# EAGLE board CT_schematic (EAGLE 7.6.0)

Size 100 x 80 mm. Coordinates in mm from the lower left corner, seen from the top.
Outline: 0,0 100,0 100,80 0,80 0,0
Copper layers (1*16): Top 0.035mm / dielectric 1.5mm / Bottom 0.035mm
Design rules "default": minimum track width 10mil, minimum drill 24mil, track to track 8mil, track to pad 8mil, pad to pad 8mil, via to via 8mil, smd to smd 8mil, copper to edge 40mil, drill to drill 8mil, minimum pad ring 10mil, minimum via ring 8mil, stop-mask expansion 4mil, vias tented up to drill 0mil, thermal gap 10mil

## Footprints (pad centres in the part's own frame; a part is rotated, then mirrored left to right if it is on the bottom)
C0603 = smd 0.8 x 0.8: 1 -0.762,0; 2 0.762,0
C0402 = smd 0.5 x 0.5: 1 -0.508,0; 2 0.508,0
C1210 = smd 1.2 x 2.5: 1 -1.524,0; 2 1.524,0
EXV-9H = smd 3.505 x 1.676: 1 -2.857,0; 2 2.857,0
L0603 = smd 0.8 x 0.8: 1 -0.762,0; 2 0.762,0
PJ-037B_PACKAGE = drill 3.7 square: 1 12,0 | drill 3.2 square: 2 6,0
R0603 = smd 0.8 x 0.8: 1 -0.762,0; 2 0.762,0
WLCSP64 = smd 0.34 x 0.34: A1 -1.75,1.75; A2 -1.25,1.75; A3 -0.75,1.75; A4 -0.25,1.75; A5 0.25,1.75; A6 0.75,1.75; A7 1.25,1.75; A8 1.75,1.75; B1 -1.75,1.25; B2 -1.25,1.25; B3 -0.75,1.25; B4 -0.25,1.25; B5 0.25,1.25; B6 0.75,1.25; B7 1.25,1.25; B8 1.75,1.25; C1 -1.75,0.75; C2 -1.25,0.75; C3 -0.75,0.75; C4 -0.25,0.75; C5 0.25,0.75; C6 0.75,0.75; C7 1.25,0.75; C8 1.75,0.75; D1 -1.75,0.25; D2 -1.25,0.25; D3 -0.75,0.25; D4 -0.25,0.25; D5 0.25,0.25; D6 0.75,0.25; D7 1.25,0.25; D8 1.75,0.25; E1 -1.75,-0.25; E2 -1.25,-0.25; E3 -0.75,-0.25; E4 -0.25,-0.25; E5 0.25,-0.25; E6 0.75,-0.25; E7 1.25,-0.25; E8 1.75,-0.25; F1 -1.75,-0.75; F2 -1.25,-0.75; F3 -0.75,-0.75; F4 -0.25,-0.75; F5 0.25,-0.75; F6 0.75,-0.75; F7 1.25,-0.75; F8 1.75,-0.75; G1 -1.75,-1.25; G2 -1.25,-1.25; G3 -0.75,-1.25; G4 -0.25,-1.25; G5 0.25,-1.25; G6 0.75,-1.25; G7 1.25,-1.25; G8 1.75,-1.25; H1 -1.75,-1.75; H2 -1.25,-1.75; H3 -0.75,-1.75; H4 -0.25,-1.75; H5 0.25,-1.75; H6 0.75,-1.75; H7 1.25,-1.75; H8 1.75,-1.75
SAMTEC_FTSH-105-01-L-DV-K = smd 0.762 x 2.794: 1 -2.54,-2.032; 2 -2.54,2.032; 3 -1.27,-2.032; 4 -1.27,2.032; 5 0,-2.032; 6 0,2.032; 7 1.27,-2.032; 8 1.27,2.032; 9 2.54,-2.032; 10 2.54,2.032
TDFN-8/6MM = smd 0.3 x 0.75: 1 0,0; 2 0.5,0; 3 1,0; 4 1.5,0; 5 1.5,3; 6 1,3; 7 0.5,3; 8 0,3
TFBGA-153 = smd 0.3 x 0.3: A1 -3.25,3.25; A2 -2.75,3.25; A3 -2.25,3.25; A4 -1.75,3.25; A5 -1.25,3.25; A6 -0.75,3.25; A7 -0.25,3.25; A8 0.25,3.25; A9 0.75,3.25; A10 1.25,3.25; A11 1.75,3.25; A12 2.25,3.25; A13 2.75,3.25; A14 3.25,3.25; B1 -3.25,2.75; B2 -2.75,2.75; B3 -2.25,2.75; B4 -1.75,2.75; B5 -1.25,2.75; B6 -0.75,2.75; B7 -0.25,2.75; B8 0.25,2.75; B9 0.75,2.75; B10 1.25,2.75; B11 1.75,2.75; B12 2.25,2.75; B13 2.75,2.75; B14 3.25,2.75; C1 -3.25,2.25; C2 -2.75,2.25; C3 -2.25,2.25; C4 -1.75,2.25; C5 -1.25,2.25; C6 -0.75,2.25; C7 -0.25,2.25; C8 0.25,2.25; C9 0.75,2.25; C10 1.25,2.25; C11 1.75,2.25; C12 2.25,2.25; C13 2.75,2.25; C14 3.25,2.25; D1 -3.25,1.75; D2 -2.75,1.75; D3 -2.25,1.75; D4 -1.75,1.75; D12 2.25,1.75; D13 2.75,1.75; D14 3.25,1.75; E1 -3.25,1.25; E2 -2.75,1.25; E3 -2.25,1.25; E5 -1.25,1.25; E6 -0.75,1.25; E7 -0.25,1.25; E8 0.25,1.25; E9 0.75,1.25; E10 1.25,1.25; E12 2.25,1.25; E13 2.75,1.25; E14 3.25,1.25; F1 -3.25,0.75; F2 -2.75,0.75; F3 -2.25,0.75; F5 -1.25,0.75; F10 1.25,0.75; F12 2.25,0.75; F13 2.75,0.75; F14 3.25,0.75; G1 -3.25,0.25; G2 -2.75,0.25; G3 -2.25,0.25; G5 -1.25,0.25; G10 1.25,0.25; G12 2.25,0.25; G13 2.75,0.25; G14 3.25,0.25; H1 -3.25,-0.25; H2 -2.75,-0.25; H3 -2.25,-0.25; H5 -1.25,-0.25; H10 1.25,-0.25; H12 2.25,-0.25; H13 2.75,-0.25; H14 3.25,-0.25; J1 -3.25,-0.75; J2 -2.75,-0.75; J3 -2.25,-0.75; J5 -1.25,-0.75; J10 1.25,-0.75; J12 2.25,-0.75; J13 2.75,-0.75; J14 3.25,-0.75; K1 -3.25,-1.25; K2 -2.75,-1.25; K3 -2.25,-1.25; K5 -1.25,-1.25; K6 -0.75,-1.25; K7 -0.25,-1.25; K8 0.25,-1.25; K9 0.75,-1.25; K10 1.25,-1.25; K12 2.25,-1.25; K13 2.75,-1.25; K14 3.25,-1.25; L1 -3.25,-1.75; L2 -2.75,-1.75; L3 -2.25,-1.75; L12 2.25,-1.75; L13 2.75,-1.75; L14 3.25,-1.75; M1 -3.25,-2.25; M2 -2.75,-2.25; M3 -2.25,-2.25; M4 -1.75,-2.25; M5 -1.25,-2.25; M6 -0.75,-2.25; M7 -0.25,-2.25; M8 0.25,-2.25; M9 0.75,-2.25; M10 1.25,-2.25; M11 1.75,-2.25; M12 2.25,-2.25; M13 2.75,-2.25; M14 3.25,-2.25; N1 -3.25,-2.75; N2 -2.75,-2.75; N3 -2.25,-2.75; N4 -1.75,-2.75; N5 -1.25,-2.75; N6 -0.75,-2.75; N7 -0.25,-2.75; N8 0.25,-2.75; N9 0.75,-2.75; N10 1.25,-2.75; N11 1.75,-2.75; N12 2.25,-2.75; N13 2.75,-2.75; N14 3.25,-2.75; P1 -3.25,-3.25; P2 -2.75,-3.25; P3 -2.25,-3.25; P4 -1.75,-3.25; P5 -1.25,-3.25; P6 -0.75,-3.25; P7 -0.25,-3.25; P8 0.25,-3.25; P9 0.75,-3.25; P10 1.25,-3.25; P11 1.75,-3.25; P12 2.25,-3.25; P13 2.75,-3.25; P14 3.25,-3.25
DFN-6 = smd 0.805 x 0.3: 1 -0.952,0.5; 2 -0.952,0; 3 -0.952,-0.5; 4 0.952,-0.5; 5 0.952,0; 6 0.952,0.5 | smd 0.61 x 1.42: 7 0,0
ABS07-32.768KHZ-7-T = smd 1.1 x 2.4: 1 -2.5,0; 2 0,0
ABLS-25.000MHZ-B2F-T = smd 5.6 x 2.8: 1 -3.81,0; 2 5.69,0
WSON-8 = smd 0.3 x 0.6: 1 -0.75,0; 2 0.05,0; 3 0.85,0; 4 1.65,0; 5 1.65,3.8; 6 0.85,3.8; 7 0.05,3.8; 8 -0.75,3.8 | smd 3 x 2.6: PAD 0.45,1.9
SON-6 = smd 0.55 x 0.3: 1 -0.355,0.5 | smd 0.52 x 0.3: 2 -0.37,0; 3 -0.37,-0.5; 4 0.37,-0.5; 5 0.37,0; 6 0.37,0.5
SW_4-1437565-2 = smd 1.4 x 2.1: 1 -2.23,4.55; 2 -2.23,-4.55; 3 2.23,4.55; 4 2.23,-4.55
LGM67K-G1J2-24-Z = smd 0.8 x 1.4: A -2,0; C 0,0
NC7SZ125M5X = smd 1.3 x 0.7: 1 -1.3,0.95; 2 -1.3,0; 3 -1.3,-0.95; 4 1.3,-0.95; 5 1.3,0.95
DUMMY_PACKAGE_181 = drill 0.3: 1 0,-1; 2 1.5,-1; 3 3,-1

## Placement (x,y rotation side)
C1  1e-06  [C0603]  -49.53,63.5 0 top  (outside the outline)
C2  1e-07  [C0603]  -53.34,63.5 0 top  (outside the outline)
C3  1e-07  [C0603]  -57.15,63.5 0 top  (outside the outline)
C4  1e-07  [C0603]  -60.96,63.5 0 top  (outside the outline)
C5  1e-07  [C0603]  -64.77,63.5 0 top  (outside the outline)
C6  1e-07  [C0603]  -68.58,63.5 0 top  (outside the outline)
C7  4.7e-06  [C0603]  -34.29,63.5 0 top  (outside the outline)
C8  1e-08  [C0603]  -15.24,68.58 0 top  (outside the outline)
C9  1e-06  [C0603]  -19.05,68.58 0 top  (outside the outline)
C10  1e-11  [C0402]  -68.58,68.58 0 top  (outside the outline)
C11  1e-11  [C0402]  -15.24,73.66 0 top  (outside the outline)
C12  1e-11  [C0402]  -19.05,73.66 0 top  (outside the outline)
C13  1e-11  [C0402]  -22.86,73.66 0 top  (outside the outline)
C14  1e-07  [C0402]  -26.67,73.66 0 top  (outside the outline)
C15  1e-08  [C0402]  -30.48,73.66 0 top  (outside the outline)
C16  1e-07  [C0402]  -34.29,73.66 0 top  (outside the outline)
C17  2.2e-06  [C0603]  -38.1,63.5 0 top  (outside the outline)
C18  2.2e-06  [C0603]  -41.91,63.5 0 top  (outside the outline)
C19  1e-07  [C0402]  -38.1,73.66 0 top  (outside the outline)
C20  1e-07  [C0402]  -41.91,73.66 0 top  (outside the outline)
C21  2.2e-06  [C0603]  -45.72,63.5 0 top  (outside the outline)
C22  1e-07  [C0402]  -45.72,73.66 0 top  (outside the outline)
C23  1e-08  [C0402]  -49.53,73.66 0 top  (outside the outline)
C24  1e-05  [C1210]  -16.51,52.07 0 top  (outside the outline)
C25  1e-05  [C1210]  -22.86,52.07 0 top  (outside the outline)
C26  1e-07  [C0402]  -53.34,73.66 0 top  (outside the outline)
C27  0.0001  [EXV-9H]  -52.07,36.83 0 top  (outside the outline)
C28  0.0001  [EXV-9H]  -63.5,36.83 0 top  (outside the outline)
C29  1e-08  [C0402]  -57.15,73.66 0 top  (outside the outline)
C30  1e-08  [C0402]  -60.96,73.66 0 top  (outside the outline)
C31  1e-08  [C0402]  -64.77,73.66 0 top  (outside the outline)
F1  240.0  [L0603]  -22.86,68.58 0 top  (outside the outline)
J1  PJ-037B  [PJ-037B_PACKAGE]  -27.94,25.4 0 top  (outside the outline)
R2  1000.0  [R0603]  -26.67,68.58 0 top  (outside the outline)
R4  4700.0  [R0603]  -30.48,68.58 0 top  (outside the outline)
R5  4700.0  [R0603]  -34.29,68.58 0 top  (outside the outline)
R6  2200.0  [R0603]  -38.1,68.58 0 top  (outside the outline)
R7  2200.0  [R0603]  -41.91,68.58 0 top  (outside the outline)
R8  2200.0  [R0603]  -45.72,68.58 0 top  (outside the outline)
R9  2200.0  [R0603]  -49.53,68.58 0 top  (outside the outline)
R10  10000.0  [R0603]  -62.23,52.07 0 top  (outside the outline)
R11  10000.0  [R0603]  -67.31,52.07 0 top  (outside the outline)
R12  10000.0  [R0603]  -15.24,58.42 0 top  (outside the outline)
R13  10000.0  [R0603]  -20.32,58.42 0 top  (outside the outline)
R14  10000.0  [R0603]  -25.4,58.42 0 top  (outside the outline)
R15  5.0  [R0603]  -53.34,68.58 0 top  (outside the outline)
R16  34000.0  [R0603]  -30.48,58.42 0 top  (outside the outline)
R17  34000.0  [R0603]  -35.56,58.42 0 top  (outside the outline)
R18  34000.0  [R0603]  -40.64,58.42 0 top  (outside the outline)
R19  34000.0  [R0603]  -45.72,58.42 0 top  (outside the outline)
R20  34000.0  [R0603]  -50.8,58.42 0 top  (outside the outline)
R21  34000.0  [R0603]  -55.88,58.42 0 top  (outside the outline)
R22  34000.0  [R0603]  -60.96,58.42 0 top  (outside the outline)
R23  34000.0  [R0603]  -66.04,58.42 0 top  (outside the outline)
R24  34000.0  [R0603]  -15.24,63.5 0 top  (outside the outline)
R25  34000.0  [R0603]  -20.32,63.5 0 top  (outside the outline)
R26  100000.0  [R0603]  -46.99,52.07 0 top  (outside the outline)
R27  2231.0  [R0603]  -57.15,68.58 0 top  (outside the outline)
R28  1000.0  [R0603]  -60.96,68.58 0 top  (outside the outline)
R29  10000.0  [R0603]  -25.4,63.5 0 top  (outside the outline)
R30  10000.0  [R0603]  -30.48,63.5 0 top  (outside the outline)
R31  9100.0  [R0603]  -64.77,68.58 0 top  (outside the outline)
R32  680000.0  [R0603]  -52.07,52.07 0 top  (outside the outline)
R33  120000.0  [R0603]  -57.15,52.07 0 top  (outside the outline)
U1  stm32f103rdy6  [WLCSP64]  -43.18,36.83 0 top  (outside the outline)
U2  FTSH-105-01-L-DV-K  [SAMTEC_FTSH-105-01-L-DV-K]  -50.8,7.62 0 top  (outside the outline)
U3  24AA16-I/MC  [TDFN-8/6MM]  -58.42,21.59 0 top  (outside the outline)
U4  mtfc4gmcdm  [TFBGA-153]  -20.32,8.89 0 top  (outside the outline)
U5  Si7051-A20-IM  [DFN-6]  -15.24,77.47 0 top  (outside the outline)
U6  ABS07-32.768KHZ-7-T  [ABS07-32.768KHZ-7-T]  -49.53,45.72 0 top  (outside the outline)
U7  ABLS-25.000MHZ-B2F-T  [ABLS-25.000MHZ-B2F-T]  -26.67,45.72 0 top  (outside the outline)
U8  LP3878SDX-ADJ/NOPB  [WSON-8]  -30.48,35.56 0 top  (outside the outline)
U9  TPS3895ADRYR  [SON-6]  -17.78,77.47 0 top  (outside the outline)
U10  4-1437565-2  [SW_4-1437565-2]  -44.45,24.13 0 top  (outside the outline)
U11  Q65110A2395  [LGM67K-G1J2-24-Z]  -58.42,45.72 0 top  (outside the outline)
U12  nc7sz125m5x  [NC7SZ125M5X]  -27.94,52.07 0 top  (outside the outline)
U13  nc7sz125m5x  [NC7SZ125M5X]  -34.29,52.07 0 top  (outside the outline)
U14  nc7sz125m5x  [NC7SZ125M5X]  -40.64,52.07 0 top  (outside the outline)
U15  Dummy  [DUMMY_PACKAGE_181]  -71.12,73.66 0 top  (outside the outline)

## Library data of the parts
C1-C31 F1 J1 R2 R4-R33 U1-U15 = circuit_tree

## Nets
CLK_CRYSTAL_U1_B7: C10.1 U1.B7 U6.1
CLK_CRYSTAL_U1_B8: C11.1 U1.B8 U6.2
CLK_CRYSTAL_U1_D7: C12.1 U1.D7 U7.1
CLK_CRYSTAL_U1_D8: C13.1 U1.D8 U7.2
GND: C1.2 C2.2 C3.2 C4.2 C5.2 C6.2 C7.2 C8.2 C9.2 C10.2 C11.2 C12.2 C13.2 C14.2 C15.2 C16.2 C17.2 C18.2 C19.2 C20.2 C21.2 C22.2 C23.2 C24.2 C25.2 C26.2 C27.2 C28.2 C29.2 C30.2 C31.2 J1.2 R2.2 R10.2 R14.2 R15.2 R28.2 R31.2 R33.2 U1.A7 U1.B1 U1.E7 U1.F5 U1.H2 U2.3 U2.5 U3.4 U4.C4 U4.E7 U4.G5 U4.H10 U4.K8 U4.N2 U4.N5 U4.P4 U4.P6 U5.2 U5.7 U8.3 U8.PAD U9.2 U11.C U12.2 U12.3 U13.1 U13.3 U14.1 U14.3 U15.1
NET_U1_A6: R10.1 U1.A6
NET_U1_B5: R6.1 U1.B5 U5.6
NET_U1_C5: R7.1 U1.C5 U5.1
NET_U1_C7: R5.1 U1.C7 U14.4
NET_U1_F3: R9.1 U1.F3 U3.5
NET_U1_G3: R8.1 U1.G3 U3.6
NET_U1_G8: C8.1 C9.1 F1.1 U1.F7 U1.G8
NET_U1_H7: U11.A
NET_U1_H8: U10.3 U10.4
NET_U2_2: R13.1 U2.2
NET_U2_4: R14.1 U2.4
NET_U2_9: R15.1 U2.9
NET_U4_C2: C18.1 C19.1 U4.C2
NET_U4_K5: R4.1 U4.K5 U13.4
NET_U8_1: C23.1 U8.1
NET_U8_6: R27.2 R28.1 U8.6
NET_U8_8: R26.1 U8.8
NET_U9_1: R30.1 R31.1 U9.1
NET_U9_3: R32.2 R33.1 U9.3
NET_U9_4: R29.1 U9.4 U12.4 U13.2 U14.2
NET_U10_1: R2.1 U10.1 U10.2
PROC_ADC1_IN1: U1.E6 U15.2
PROC_ADC1_IN3: U1.G7 U15.3
PROC_SDIO_CK: R25.1 U1.C4 U4.M6
PROC_SDIO_CMD: R24.1 U1.A3 U4.M5
PROC_SDIO_D0: R16.1 U1.E3 U4.A3
PROC_SDIO_D1: R17.1 U1.D1 U4.A4
PROC_SDIO_D2: R18.1 U1.A2 U4.A5
PROC_SDIO_D3: R19.1 U1.B3 U4.B2
PROC_SDIO_D4: R20.1 U1.D5 U4.B3
PROC_SDIO_D5: R21.1 U1.B6 U4.B4
PROC_SDIO_D6: R22.1 U1.E1 U4.B5
PROC_SDIO_D7: R23.1 U1.E2 U4.B6
PROC_SYS_JTDI: R12.1 U1.C3 U2.8
PROC_SYS_JTDO_TRACESWO: U1.A4 U2.6
RST_OUT_U2_JTAG_RST_B: R11.1 U2.10 U12.1
VCC_S1_15V2: C24.1 C27.1 C28.1 J1.1 R26.2 U8.4
VCC_TIER1_3V3: C1.1 C2.1 C3.1 C4.1 C5.1 C6.1 C7.1 C14.1 C15.1 C16.1 C17.1 C20.1 C21.1 C22.1 C25.1 C26.1 C29.1 C30.1 C31.1 F1.2 R4.2 R5.2 R6.2 R7.2 R8.2 R9.2 R11.2 R12.2 R13.2 R16.2 R17.2 R18.2 R19.2 R20.2 R21.2 R22.2 R23.2 R24.2 R25.2 R27.1 R29.2 R30.2 R32.1 U1.A1 U1.A8 U1.C6 U1.G6 U1.H1 U2.1 U3.7 U3.8 U4.C6 U4.E6 U4.F5 U4.J10 U4.K9 U4.M4 U4.N4 U4.P3 U4.P5 U5.5 U8.5 U9.6 U12.5 U13.5 U14.5

## Tracks (layer width: path | path; a pad name or v marks a point on that pad's centre or on a via)
CLK_CRYSTAL_U1_B7  (2 unrouted)
CLK_CRYSTAL_U1_B8  (2 unrouted)
CLK_CRYSTAL_U1_D7  (2 unrouted)
CLK_CRYSTAL_U1_D8  (2 unrouted)
GND  (68 unrouted)
NET_U1_A6  (1 unrouted)
NET_U1_B5  (2 unrouted)
NET_U1_C5  (2 unrouted)
NET_U1_C7  (2 unrouted)
NET_U1_F3  (2 unrouted)
NET_U1_G3  (2 unrouted)
NET_U1_G8  (4 unrouted)
NET_U1_H8  (1 unrouted)
NET_U2_2  (1 unrouted)
NET_U2_4  (1 unrouted)
NET_U2_9  (1 unrouted)
NET_U4_C2  (2 unrouted)
NET_U4_K5  (2 unrouted)
NET_U8_1  (1 unrouted)
NET_U8_6  (2 unrouted)
NET_U8_8  (1 unrouted)
NET_U9_1  (2 unrouted)
NET_U9_3  (2 unrouted)
NET_U9_4  (4 unrouted)
NET_U10_1  (2 unrouted)
PROC_ADC1_IN1  (1 unrouted)
PROC_ADC1_IN3  (1 unrouted)
PROC_SDIO_CK  (2 unrouted)
PROC_SDIO_CMD  (2 unrouted)
PROC_SDIO_D0  (2 unrouted)
PROC_SDIO_D1  (2 unrouted)
PROC_SDIO_D2  (2 unrouted)
PROC_SDIO_D3  (2 unrouted)
PROC_SDIO_D4  (2 unrouted)
PROC_SDIO_D5  (2 unrouted)
PROC_SDIO_D6  (2 unrouted)
PROC_SDIO_D7  (2 unrouted)
PROC_SYS_JTDI  (2 unrouted)
PROC_SYS_JTDO_TRACESWO  (1 unrouted)
RST_OUT_U2_JTAG_RST_B  (2 unrouted)
VCC_S1_15V2  (5 unrouted)
VCC_TIER1_3V3  (65 unrouted)